# EAGLE board rf433schield (EAGLE 6.3)
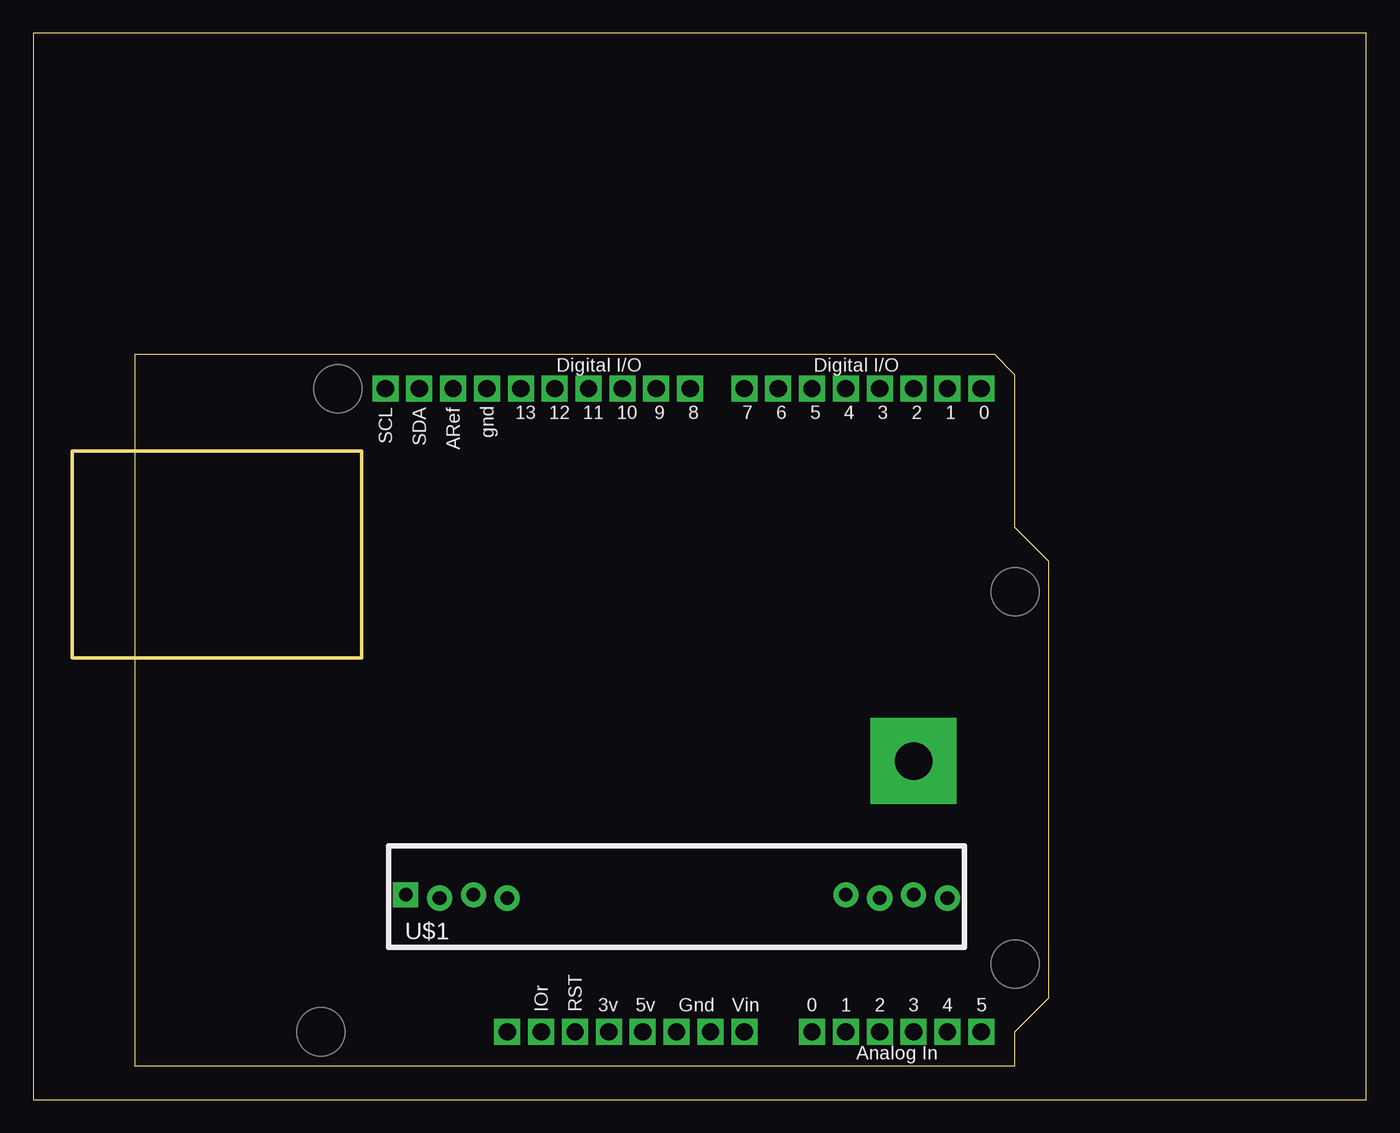
[diagram p0: board, top side]
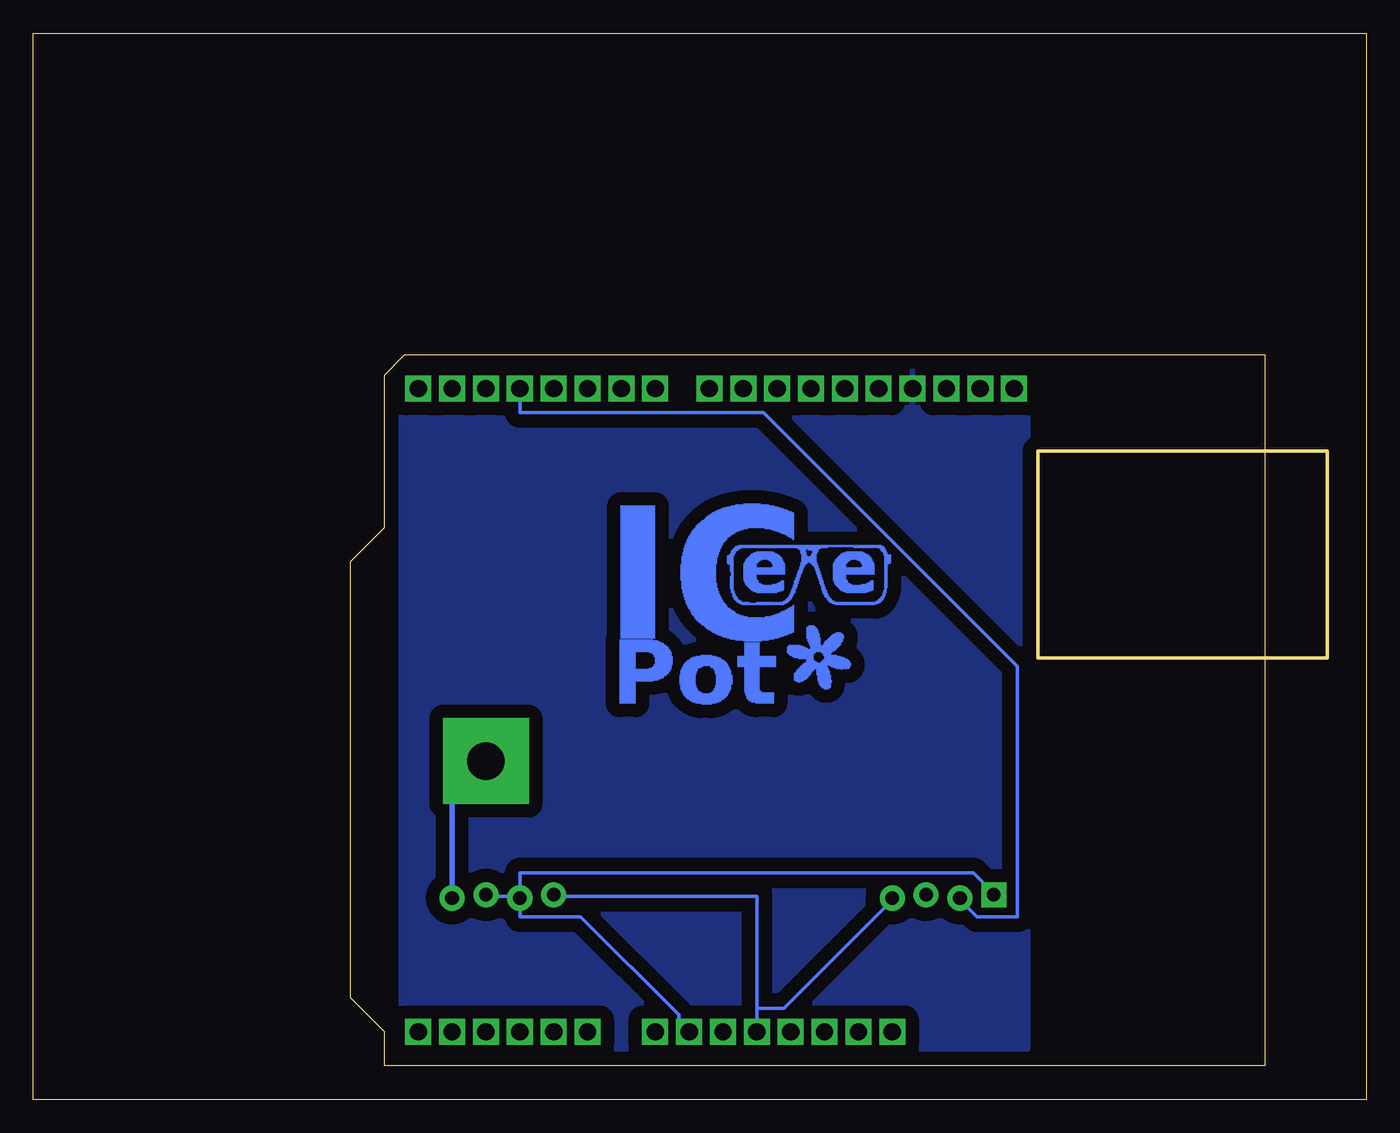
[diagram p1: board, bottom side, seen from below]

Size 100 x 80 mm. Coordinates in mm from the lower left corner, seen from the top.
Outline: 0,0 100,0 100,80 0,80 0,0
Copper layers (1*16): Top 0.035mm / dielectric 1.5mm / Bottom 0.035mm
Design rules "default *": minimum track width 10mil, minimum drill 24mil, track to track 20mil, track to pad 20mil, pad to pad 20mil, via to via 8mil, smd to smd 8mil, copper to edge 40mil, drill to drill 8mil, minimum pad ring 10mil, minimum via ring 8mil, stop-mask expansion 4mil, vias tented up to drill 0mil, thermal gap 10mil

## Footprints (pad centres in the part's own frame; a part is rotated, then mirrored left to right if it is on the bottom)
ARDUINOR3 = drill 1.3 pad 1.93 square: 3V 35.56,2.54; 5V 38.1,2.54; A0 50.8,2.54; A1 53.34,2.54; A2 55.88,2.54; A3 58.42,2.54; A4 60.96,2.54; A5 63.5,2.54; AREF 23.876,50.8; D0 63.5,50.8; D1 60.96,50.8; D2 58.42,50.8; D3 55.88,50.8; D4 53.34,50.8; D5 50.8,50.8; D6 48.26,50.8; D7 45.72,50.8; D8 41.656,50.8; D9 39.116,50.8; D10 36.576,50.8; D11 34.036,50.8; D12 31.496,50.8; D13 28.956,50.8; GND 26.416,50.8; GND1 43.18,2.54; GND2 40.64,2.54; IOREF 30.48,2.54; RESERVED 27.94,2.54; RESET 33.02,2.54; SCL 18.796,50.8; SDA 21.336,50.8; VIN 45.72,2.54
RF-LINK_RX = drill 1.016 pad 1.88: +5V@1 7.62,-0.127; +5V@2 33.02,0.127; ANT 40.64,-0.127; DATA@1 2.54,-0.127; DATA@2 5.08,0.127; GND@2 35.56,-0.127; GND@3 38.1,0.127 | drill 1.016 pad 1.88 square: GND@1 0,0.127

## Placement (x,y rotation side)
E$1  [ICEEPOT_LOGO_REV]  35.56,29.21 0 top
U1  ARDUINOR3-DIMENSION  [ARDUINOR3]  7.62,2.54 0 top
U$1  RF-LINK_RX  [RF-LINK_RX]  27.94,15.24 0 top

## Library data of the parts
E$1 U1 U$1 = RFM

## Nets
3V: U1.3V
GND: U1.GND
GND2: U1.GND2
N$1: U1.D3 U$1.DATA@1
N$2: U1.5V U$1.+5V@1 U$1.+5V@2
N$3: U1.GND1 U$1.GND@1 U$1.GND@2 U$1.GND@3
VIN: U1.VIN

## Tracks (layer width: path | path; a pad name or v marks a point on that pad's centre or on a via)
GND
  pour Bottom (isolate 1.016): 25.4,54.61 72.39,54.61 72.39,3.81 25.4,3.81
N$1
  Bottom 0.254: U1.D3 63.5,51.56 45.21,51.56 26.16,32.51 26.16,13.72 29.21,13.72 30.48,14.99 U$1.DATA@1
N$2
  Bottom 0.254: 45.72,6.86 43.69,6.86 35.56,14.99 U$1.+5V@1 | U1.5V 45.72,6.86 | 45.72,6.86 45.72,15.24 60.96,15.24 U$1.+5V@2
N$3
  Bottom 0.254: 63.5,15.24 66.04,15.24 U$1.GND@3 | 63.5,15.24 63.5,17.02 29.46,17.02 27.94,15.49 U$1.GND@1 | 63.5,15.24 U$1.GND@2 63.5,13.72 58.93,13.72 51.56,6.35 51.56,5.84 U1.GND1
N$4
  Bottom 0.406: 68.58,15.24 68.58,24.13
N$5  (via drill 2.8 pad 6.45)
  other vias: 66.04,25.4